# Altium PCB u2f.PcbDoc
Units mil, origin at the board's own origin, x right, y up, seen from the top; angles counter-clockwise.
Board outline 999.02 x 380 mil, 2 copper layers (Top Layer, Bottom Layer), stack 32.8 mil thick; 23 components, 22 nets, 105 pads, 32 vias.
Unrouted connection lines stored in the file: 1.
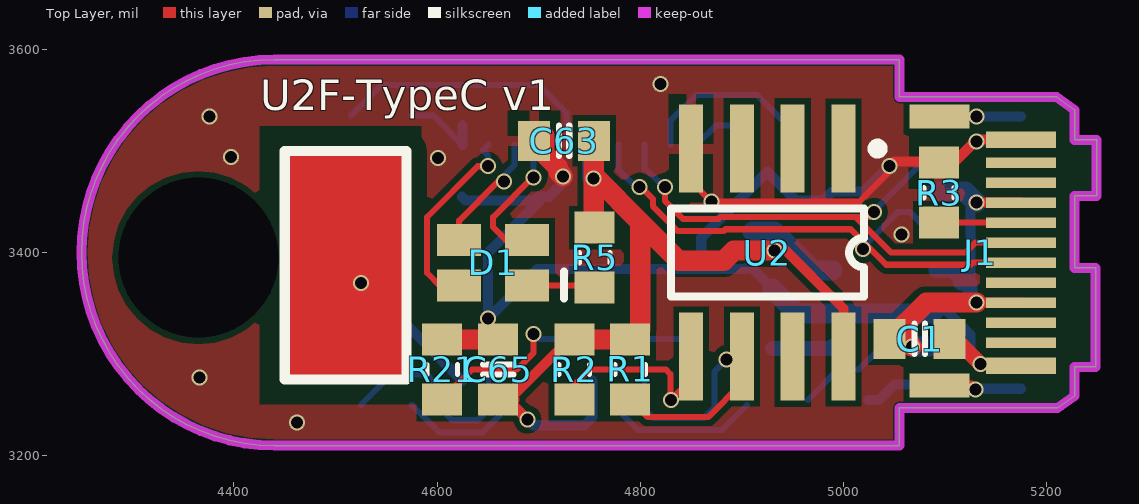
[diagram p0: Top Layer view]
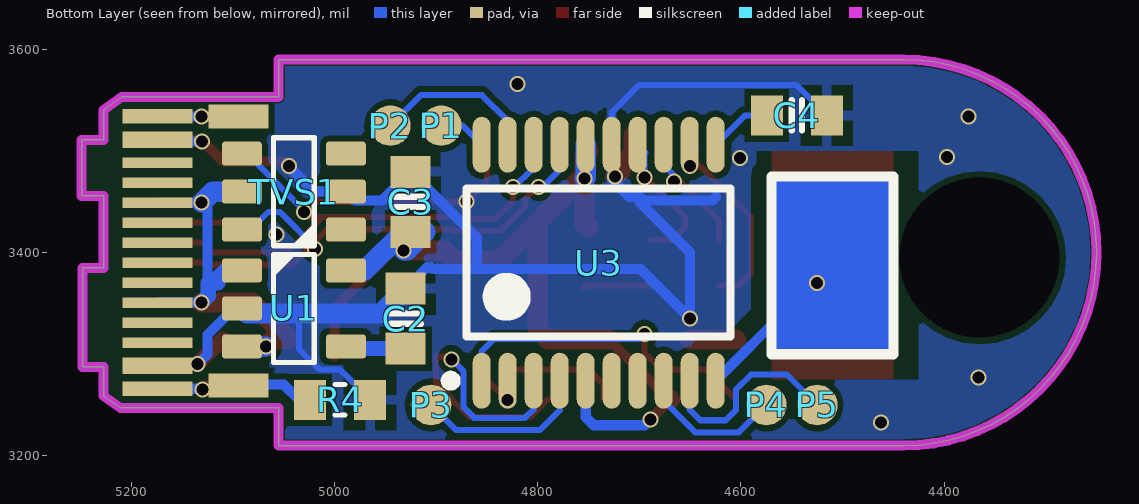
[diagram p1: Bottom Layer view, seen from below]

## Layer stack, top to bottom
Top Solder: solder mask 0.4, Solder Resist, Dk 3.5
Top Layer: signal copper 1.4
Dielectric 1: dielectric 30, FR-4, Dk 4.8
Bottom Layer: signal copper 1.4
Bottom Solder: solder mask 0.4, Solder Resist, Dk 3.5

## Board outline
5055,3210 5055,3247.05 5210.63,3247.05 5227.36,3258.86 5227.36,3287.4 5248.03,3287.4 5248.03,3384.84 5227.36,3384.84 5227.36,3455.71 5249.02,3455.71 5249.02,3510.83 5227.36,3510.83 5227.36,3540.35 5209.65,3553.15 5055,3553.15 5055,3590 4440,3590 ccw(c4440,3400) 4440,3210

## Design rules (kind name [scope] priority, off if disabled: settings)
Clearance Clearance_2 [OnLayer('Keep-Out Layer')] p1: gap=1
Clearance Clearance_1 [InNet('TSC') vs InPolygon] p2: gap=20
Clearance [All] p3: gap=6
ComponentClearance [All] p1 off: gap=10 collisioncheckmode=3 verticalgap=10 showdistances=FALSE
DiffPairsRouting [All] p1: maxlimit=10 minlimit=6 mostfreqgap=6 toplayer_minwidth=6 toplayer_maxwidth=8 toplayer_prefwidth=8 bottomlayer_minwidth=6 bottomlayer_maxwidth=8 bottomlayer_prefwidth=8 maxuncoupledlength=500
HoleSize [All] p1: absolutevalues=TRUE maxlimit=196.85 minlimit=11.81 maxpercent=80.000 minpercent=20.000
MinimumSolderMaskSliver [All] p1 off: minsoldermaskwidth=10
PolygonConnect PolygonConnect_1 [IsVia] p1: connectstyle=Direct reliefconductorwidth=10 reliefentries=4 polygonreliefangle="90 Angle" airgapwidth=10
PolygonConnect [All] p2: connectstyle=Relief reliefconductorwidth=10 reliefentries=4 polygonreliefangle="90 Angle" airgapwidth=10
RoomDefinition u2f [InComponentClass('u2f')] p1: confinementstyle=ConfineIn formatcopy=TRUE lockcomponents=FALSE outline 1925,3193.46 6295,3193.46 6295,3858.46 1925,3858.46
RoutingVias [All] p1: holewidth=11.81 width=15.75 viastyle="Through Hole" minholewidth=11.81 minwidth=15.75 maxholewidth=11.81 maxwidth=15.75
SilkToSilkClearance [All] p1 off: silktosilkclearance=10
SilkToSolderMaskClearance [IsPad] p1 off: minsilkscreentomaskgap=10 clearancetoexposedcopper=TRUE
SolderMaskExpansion [All] p1: expansion=4
Width [All] p1: maxlimit=20 minlimit=6 preferedwidth=10
24 further rules are at their usual default settings.

## Classes and differential pairs
differential pair USB: +USB_P -USB_N

## Components (designator, comment, footprint, x,y, rotation, side; value= is the part's Value field where it differs from the comment)
C1 "Cap Semi" C-1608[0603] 5075,3315 r180 top
C2 "Cap Semi" C-1608[0603] 4930,3335 r270 bottom
C3 "Cap Semi" C-1608[0603] 4925,3450 r270 bottom
C4 "Cap Semi" C-1608[0603] 4545,3535 r0 bottom
C63 "Cap Semi" C-1608[0603] 4725,3510 r0 top
C65 "Cap Semi" C-1608[0603] 4660,3285 r270 top
D1 "RGB-LED" LED-1615[0603X2]-RGB 4655,3390 r180 top
J1 "USB-TypeC-Male" USB-TypeC-Male 5175,3400 r90 top
P1 "Plug" TESTPOINT 4895,3525 r180 bottom
P2 "Plug" TESTPOINT 4945,3525 r180 bottom
P3 "Plug" TESTPOINT 4905,3250 r180 bottom
P4 "Plug" TESTPOINT 4575,3250 r180 bottom
P5 "Plug" TESTPOINT 4525,3250 r180 bottom
R1 "Res Semi" R-1608[0603] 4790,3285 r90 top
R2 "Res Semi" R-1608[0603] 4735,3285 r90 top
R3 "Res Semi" R-1608[0603] 5094,3459 r90 top
R4 "Res Semi" R-1608[0603] 4994.53,3255 r0 bottom
R5 "Res Semi" R-1608[0603] 4755,3395 r90 top
R21 "Res Semi" R-1608[0603] 4605,3285 r90 top
TVS1 "RLST236A054LV" SOT23-6 5040,3460 r0 bottom
U1 "MIC5219-3.3" SOT23-5 5040,3345 r180 bottom
U2 "ATECC508A" SOP8-3D 4925,3400 r180 top
U3 "STM32F042F6P6" TSOP65P640X120-20N 4740,3390 r90 bottom

## Footprints (in the part's own frame and the unit in brackets; to place one, negate y for a bottom-side part, rotate by r counter-clockwise, add the part's x,y. Pads: shape width x height; smd on the part's side, far side on the other; paste and mask are expansions set on the pad)
C-1608[0603] [mm] "Chip Capacitor; Body 1.6 x 0.8 mm (LxW typ)"
  rect 0.8x1 smd: 1(-0.75,0) 2(0.75,0)
  silkscreen extent -0.13,-0.38 0.13,0.38, body extent -0.8,-0.42 0.8,0.38, height 0.29
LED-1615[0603X2]-RGB [mm] "Chip Diode; Body 1.6 x 1.5 mm (LxW typ)"
  rect 1.1x0.8 smd: A(-0.85,0.571) K1(-0.85,-0.572) K2(0.85,0.572) K3(0.85,-0.571)
  silkscreen extent -1.78,0.22 -1.78,0.89
R-1608[0603] [mm] "Chip Resistor; Body 1.6 x 0.8 mm (LxW typ)"
  rect 0.8x1 smd: 1(-0.75,0) 2(0.75,0)
  silkscreen extent -0.13,-0.38 0.13,0.38, body extent -1.27,-0.51 1.33,0.49, height 0.48
SOP8-3D [mm] "Small Outline; 8 Leads; Body Width 4.3 mm; Pitch 1.27 mm"
  rect 0.6x2.2 smd: 1(-1.905,-2.6) 2(-0.635,-2.6) 3(0.635,-2.6) 4(1.905,-2.6) 5(1.905,2.6) 6(0.635,2.6) 7(-0.635,2.6) 8(-1.905,2.6)
  silkscreen extent -2.88,-2.72 2.41,1.1, body extent -2.45,-3.05 2.45,2.95, height 1.75
SOT23-5 [mm]
  round 0.5 on Mech15: 0(0,0)
  rrect25% 1x0.6 smd: 1(-1.3,0.95) 2(-1.3,0) 3(-1.3,-0.95) 4(1.3,-0.95) 5(1.3,0.95)
  silkscreen extent -0.51,-1.35 0.51,1.35, body extent -1.4,-1.45 1.4,1.45, height 1.44
SOT23-6 [mm]
  round 0.5 on Mech15: 0(0,0)
  rrect25% 1x0.6 smd: 1(-1.3,0.95) 2(-1.3,0) 3(-1.3,-0.95) 4(1.3,-0.95) 5(1.3,0) 6(1.3,0.95)
  silkscreen extent -0.51,-1.35 0.51,1.35, body extent -1.4,-1.45 1.4,1.45, height 1.44
TESTPOINT [mil]
  round 40 smd paste-100: 1(0,0)
TSOP65P640X120-20N [mm] "TSOP, 20-Leads, Body 6.50x4.40mm, Pitch 0.65mm, IPC Medium Density"
  oval 1.4x0.45 smd: 1(-2.95,2.925) 2(-2.95,2.275) 3(-2.95,1.625) 4(-2.95,0.975) 5(-2.95,0.325) 6(-2.95,-0.325) 7(-2.95,-0.975) 8(-2.95,-1.625) 9(-2.95,-2.275) 10(-2.95,-2.925) 11(2.95,-2.925) 12(2.95,-2.275) 13(2.95,-1.625) 14(2.95,-0.975) 15(2.95,-0.325) 16(2.95,0.325) 17(2.95,0.975) 18(2.95,1.625) 19(2.95,2.275) 20(2.95,2.925)
  silkscreen extent -3.07,-3.3 1.85,3.83, body extent -3.2,-3.3 3.2,3.3, height 1.2
USB-TypeC-Male [mm] "DX07P024AJ1"
  rect 0.41x1.75 smd: A1(2.825,0.014) A12(-2.825,0.014)
  rect 0.26x1.75 smd: A2(2.25,0.014) A3(1.75,0.014) A4(1.25,0.014) A5(0.75,0.014) A6(0.25,0.014) A7(-0.25,0.014) A8(-0.75,0.014) A9(-1.25,0.014) A10(-1.75,0.014) A11(-2.25,0.014)
  rect 0.41x1.75 smd far side: B1(-2.825,0.014) B12(2.825,0.014)
  rect 0.26x1.75 smd far side: B2(-2.25,0.014) B3(-1.75,0.014) B4(-1.25,0.014) B5(-0.75,0.014) B6(-0.25,0.014) B7(0.25,0.014) B8(0.75,0.014) B9(1.25,0.014) B10(1.75,0.014) B11(2.25,0.014)
  rect 0.36x1.75 smd far side: SH(-3.405,0.014) SH(3.405,0.014)
  rect 0.6x1.5 smd: SH(-3.325,2.05) SH(3.4,2.05)
  rect 0.6x1.5 smd far side: SH(-3.325,2.05) SH(3.4,2.05)
  body extent -4.15,-11.08 4.1,1.92, height 1.2

## Part data
C1 C2 C3 C4 C63 C65: "Capacitor (Semiconductor SIM Model)"
D1: library part RGBLED_CA
R1 R2 R3 R4 R5 R21: "Semiconductor Resistor"
U1: library part MIC5219, "500mA-Peak Output LDO Regulator"
U3: library part STM32F042FxP

## Free pads (board coordinates)
  round 0 hole 157.48 unplated: hole(4365,3395)

## Via types
v1: diameter 15.75, hole 11.81, Top Layer to Bottom Layer, tented both sides, 32 vias

## Nets (pads, with @x,y where several pads share a name; then routed paths per layer and width w, separated by ;. In a path a pad name is that pad's centre, name@x,y a point inside that pad or via, vN(x,y) a via of type N, cw(c..) or ccw(c..) an arc to the next point about the centre after c; other vN are vias at no path point)
+3.3V: C3.2 C63.2 C65.2 R1.2 R2.2 R5.2 U1.5 U2.8 U3.5 U3.16 | length 990.6
  Top Layer w10: C65.2@4670,3255.47 4670,3254.62 v1(4688.82,3235.8) ; C65.2@4670.94,3255.47 R2.2@4730,3314.53 ; v1(4932,3402) 4937,3402 4940,3405 5000,3345 U2.8
  Top Layer w20: C65.2@4670,3255.47 C65.2@4670.94,3255.47 ; R2.2@4730,3314.53 R2.2 R1.2 4800,3324.53 4800,3430 ; R5.2@4750,3424.53 4754,3428.53 v1(4754,3473) ; C63.2@4750,3500.47 4754,3496.47 v1(4754,3473) ; v1(4932,3402) 4892,3402 4882,3392 4838,3392 4800,3430 ; v1(4754,3473) 4757,3473 4800,3430
  Bottom Layer w10: v1(4688.82,3235.8) 4694.62,3230 4745,3230 4752.8,3237.8 U3.5
  Bottom Layer w20: U3.16 4752.8,3474.2 v1(4754,3473) ; v1(4932,3402) 4928.94,3402 4910.47,3420.47 C3.2 4932.12,3420.47 4970.19,3382.4 U1.5
+5V: C1.2 J1.A4 J1.A9 J1.B4 J1.B9 TVS1.5 U1.1 U1.3 | length 482.1
  Top Layer w10: v1(5130.79,3350.79) J1.A9 ; v1(5130.79,3449.21) J1.A4
  Top Layer w20: v1(5067.4,3307.6) 5060,3315 C1.2 5081.26,3350.79 v1(5130.79,3350.79)
  Bottom Layer w10: 5125,3356.57 5125,3443.43 v1(5130.79,3449.21) ; v1(5130.79,3350.79) J1.B4
  Bottom Layer w15: U1.1 5107.6,3382.4 5115,3375 5115,3370.04 5124.37,3370.04 5124.37,3357.21 5125,3356.57 v1(5130.79,3350.79)
  Bottom Layer w20: v1(5067.4,3307.6) U1.3 ; TVS1.5 5120,3460 v1(5130.79,3449.21)
BOOT: R21.1 U3.1 | length 323.8
  Top Layer w6: R21.1 4634.53,3285 4678.63,3285 4695,3301.37 v1(4695,3320)
  Bottom Layer w6: v1(4695,3320) 4700,3315 4842.84,3315 4855.16,3302.68 U3.1
GND: C1.1 C2.1 C3.1 C4.1 C63.1 C65.1 J1.A1 J1.A12 J1.B1 J1.B12 R3.2 R4.1 R21.2 TVS1.2 U1.2 U2.4 U3.15 | length 2048.5
  Top Layer w6: U2.4 4850,3470 v1(4869.94,3450.05) 5015.54,3450.05 5045,3479.52 v1(5045,3485)
  Top Layer w10: v1(5045,3485) 5049.53,3489.53 5109.53,3489.53 v1@5130.7,3510.7 ; C1.1 C1.1@5110,3315 ; v1(5130.7,3509.3) v1@5130.7,3510.7 ; J1.A1 5131.22,3511.22 v1@5130.7,3510.7
  Top Layer w15: C1.1@5110,3315 v1(5134.86,3290.14)
  Top Layer w20: R21.2 C65.1@4650,3314.53 ; C63.1@4705.47,3515 4705.47,3497.29 4718.87,3483.89 4718.87,3480 v1(4723.87,3475)
  Bottom Layer w6: C4.1 4545.47,3565 4700,3565 4727.2,3537.8 U3.15 ; R4.1 4995,3285 5015,3285 5035,3305 5035,3340
  Bottom Layer w10: 4624.53,3455 4628.4,3451.13 4696.13,3451.13 4700,3455 ; v1@4726.94,3471.94 4710,3455 4700,3455 ; C2.1 4909.53,3385 4904.7,3385 4903.7,3384 4860,3384 ; v1(5045,3485) 5020,3460 TVS1.2 4979.96,3451.14 4953.39,3451.14 C3.1 4860,3414.53 4860,3384 ; U1.2 5099.1,3345 5125,3319.1 5125,3300 v1(5134.86,3290.14) ; v1(5130.7,3509.3) 5174.45,3509.3 J1.B12 ; 4700,3455 4700,3450 4650,3400 v1(4650,3335) 4699,3384 4860,3384
  Bottom Layer w20: C2.1 4954.53,3340 5035,3340 5086.18,3340 U1.2
  other v1: 4461.93,3232.59 4366,3277 5057,3418 4601,3493 4397,3494 4376,3534 4820,3566
I2C_SCL: R1.1 U2.6 U3.3 | length 330.4
  Top Layer w6: R1.1 4807.35,3238.13 4866.87,3238.13 4900,3271.25 U2.6 4887.64,3297.64 v1(4885,3295)
  Bottom Layer w6: U3.3 4803.98,3246.02 4812.7,3237.3 4862.55,3237.3 4873.02,3247.76 4873.02,3283.02 v1(4885,3295)
I2C_SDA: R2.1 U2.5 U3.2 | length 193.7
  Top Layer w6: R2.1 4735,3270 4750,3285 4825,3285 4829.53,3280.47 4829.53,3255.47 v1(4830,3255) 4850,3275 U2.5
NetC2_2: C2.2 U1.4 | length 59.7
  Bottom Layer w15: C2.2 4986.69,3305.47 U1.4
NetD1_A: D1.A R5.1 | length 67.4
  Top Layer w6: D1.A 4752.97,3367.5 R5.1
NetD1_K1: D1.K1 U3.14 | length 140.5
  Top Layer w6: D1.K1 4667.5,3412.5 4655,3425 4655,3435 4694,3474 v1(4695,3474)
  Bottom Layer w6: v1(4695,3474) 4695,3497.53 4694,3498.53 U3.14
NetD1_K2: D1.K2 U3.12 | length 197.9
  Top Layer w6: D1.K2 4602.5,3367.5 4590,3380 4590,3435 4640,3485 v1(4650,3485)
  Bottom Layer w6: v1(4650,3485) 4650,3495.71 4645,3500.71 U3.12
NetD1_K3: D1.K3 U3.13 | length 119.7
  Top Layer w6: D1.K3 4621.54,3431.54 4660,3470 v1(4666,3470)
  Bottom Layer w6: v1(4666,3470) 4666,3476 4676.02,3486.02 U3.13
NetJ1_A5: J1.A5 R3.1 | length 94.8
  Top Layer w6: R3.1@5080,3430.47 5080.94,3429.53 J1.A5
NetJ1_SH: J1.SH R4.2 | length 237.4
  Top Layer w10: J1.SH@5094.29,3269.09 5125.91,3269.09 v1(5130,3265)
  Bottom Layer w10: R4.2 5035,3255 5050,3270 J1.SH@5093.39,3270 ; J1.SH@5094.29,3533.86 v1@5130.75,3533.86 ; v1@5130,3265.94 J1.SH@5174.45,3265.94 ; v1(5130.94,3534.06) J1.SH@5174.45,3534.06
NRST: P3.1 U3.4 | length 145
  Bottom Layer w6: 4778.39,3245 4798.09,3225.3 4880.3,3225.3 P3.1
SWDCLK: P1.1 U3.20 | length 47.7
  Bottom Layer w6: U3.20 4874.02,3525 P1.1
SWDIO: P2.1 U3.19 | length 161.8
  Bottom Layer w6: U3.19 4829.57,3529.57 4855,3555 4915,3555 P2.1
TSC: U3.10 | length 139.7
  Bottom Layer w10: v1(4525,3370) 4550,3345 4553.7,3345 U3.10
TSC_CAP: C4.2 U3.11 | length 81.3
  Bottom Layer w6: C4.2 4595.98,3535 U3.11
  Bottom Layer w10: U3.11 U3.11@4624.84,3525.16
UART2_RX: P5.1 U3.9 | length 201
  Bottom Layer w6: P5.1 4555,3280 4590,3280 4605,3265 4605,3245 4615,3235 4640,3235 4650.43,3245.43 U3.9
UART2_TX: P4.1 U3.8 | length 144.9
  Bottom Layer w6: P4.1 4602,3223 4644.97,3223 4676.02,3254.05 U3.8
USB_N: J1.A7 TVS1.6 U3.17 | length 563
  Top Layer w6: v1(4799.05,3464.71) 4799.05,3466.11 4812.32,3452.85 4812.32,3445.71 4836.85,3421.18 4881.9,3421.18 4883.72,3423 5007,3423 5039.84,3390.16 5042,3388 5124.97,3388 5127.13,3390.16 J1.A7
  Bottom Layer w6: U3.17 4778.39,3481.61 4795.29,3464.71 v1(4799.05,3464.71) ; v1(5019.36,3403.75) 5019.36,3405.49 5053.86,3440 5065,3440 5082.4,3422.6 TVS1.6
USB_P: J1.A6 TVS1.4 U3.18 | length 548.5
  Top Layer w6: v1(4824.32,3464.71) 4824.32,3450.68 4841.82,3433.18 4876.93,3433.18 4878.75,3435 5011.97,3435 ; v1(5030,3440) 5025,3435 5011.97,3435 ; J1.A6 5129.84,3409.84 5120,3400 5046.97,3400 5011.97,3435
  Bottom Layer w6: U3.18 4803.98,3481.58 4806.04,3481.58 4822.92,3464.71 v1(4824.32,3464.71) ; v1(5030,3440) 5030,3441.31 5086.09,3497.4 TVS1.4
pads on no net: J1.A2 J1.A3 J1.A8 J1.A10 J1.A11 J1.B2 J1.B3 J1.B5 J1.B6 J1.B7 J1.B8 J1.B10 J1.B11 TVS1.0 TVS1.1 TVS1.3 U1.0 U2.1 U2.2 U2.3 U2.7 U3.6 U3.7

## Polygon pours and split planes (outlines as drawn)
GND on Bottom Layer "Bottom Layer-No Net" (solid, remove dead copper, pour order 0): 4250,3600 5135,3600 5135,3200 4250,3200
GND on Top Layer "Bottom Layer-No Net" (solid, remove dead copper, pour order 2): 4250,3600 5135,3600 5135,3200 4250,3200

## Keep-outs
Keep-Out Layer:
  lines w10: 4440,3210 cw(c4440,3400) 4440,3590 5055,3590 5055,3553.15 5124.02,3553.15 5209.65,3553.15 5227.36,3540.35 5227.36,3510.83 5249.02,3510.83 5249.02,3455.71 5227.36,3455.71 5227.36,3384.84 5248.03,3384.84 5248.03,3287.4 5227.36,3287.4 5227.36,3258.86 5210.63,3247.05 5124.02,3247.05 5055,3247.05 5055,3210 4440,3210

## Other copper
Top Layer:
  rectangle net TSC: 4450,3275 4570,3500
  pour cut-out: 4585,3525 4585,3250 4425,3250 4425,3525
Bottom Layer:
  rectangle net TSC: 4450,3300 4570,3475
  pour cut-out: 4585,3500 4585,3275 4425,3275 4425,3500

## Silkscreen, mask and mechanical layers (free items; w line width, h text height)
Top Overlay:
  lines w10: 4450,3275 4570,3275 4570,3500 4450,3500 4450,3275
  text "U2F-TypeC v1" at 4426,3540 h30
Bottom Overlay:
  lines w10: 4450,3300 4570,3300 4570,3475 4450,3475 4450,3300